# Altium PCB pcbalim.PcbDoc
Units mm, origin at the board's own origin, x right, y up, seen from the top; angles counter-clockwise.
Board outline 83.57 x 50.17 mm, 2 copper layers (Top Layer, Bottom Layer); 22 components, 9 nets, 53 pads, 0 vias.
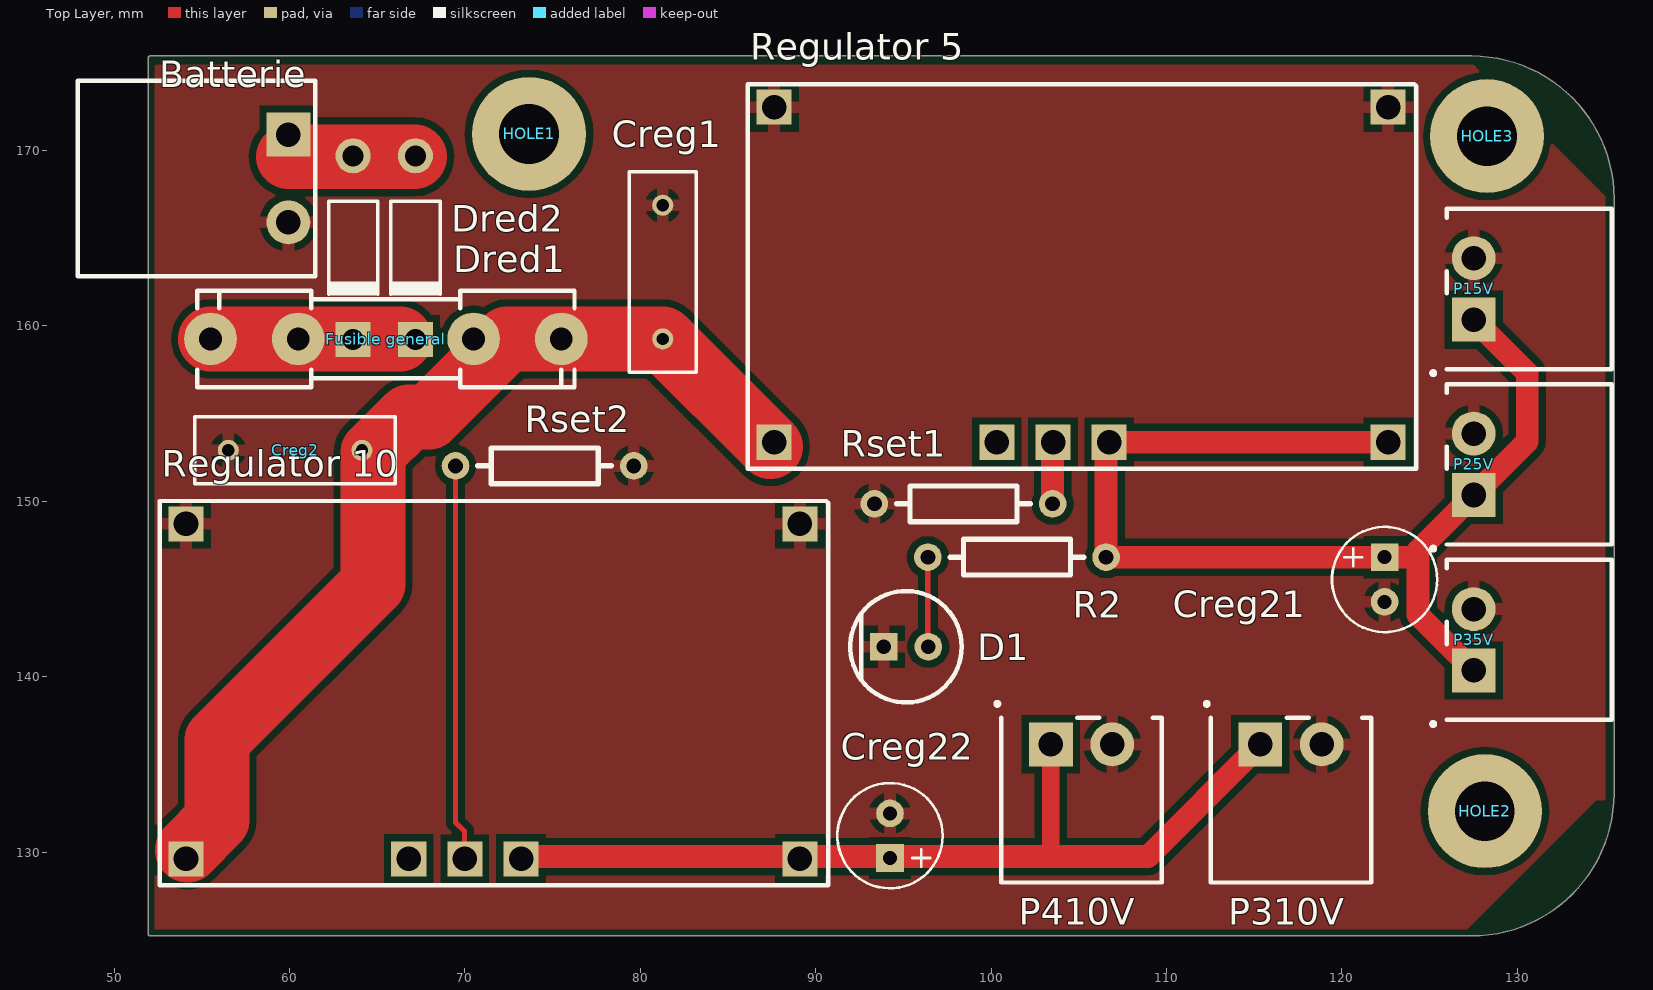
[diagram p0: Top Layer view]
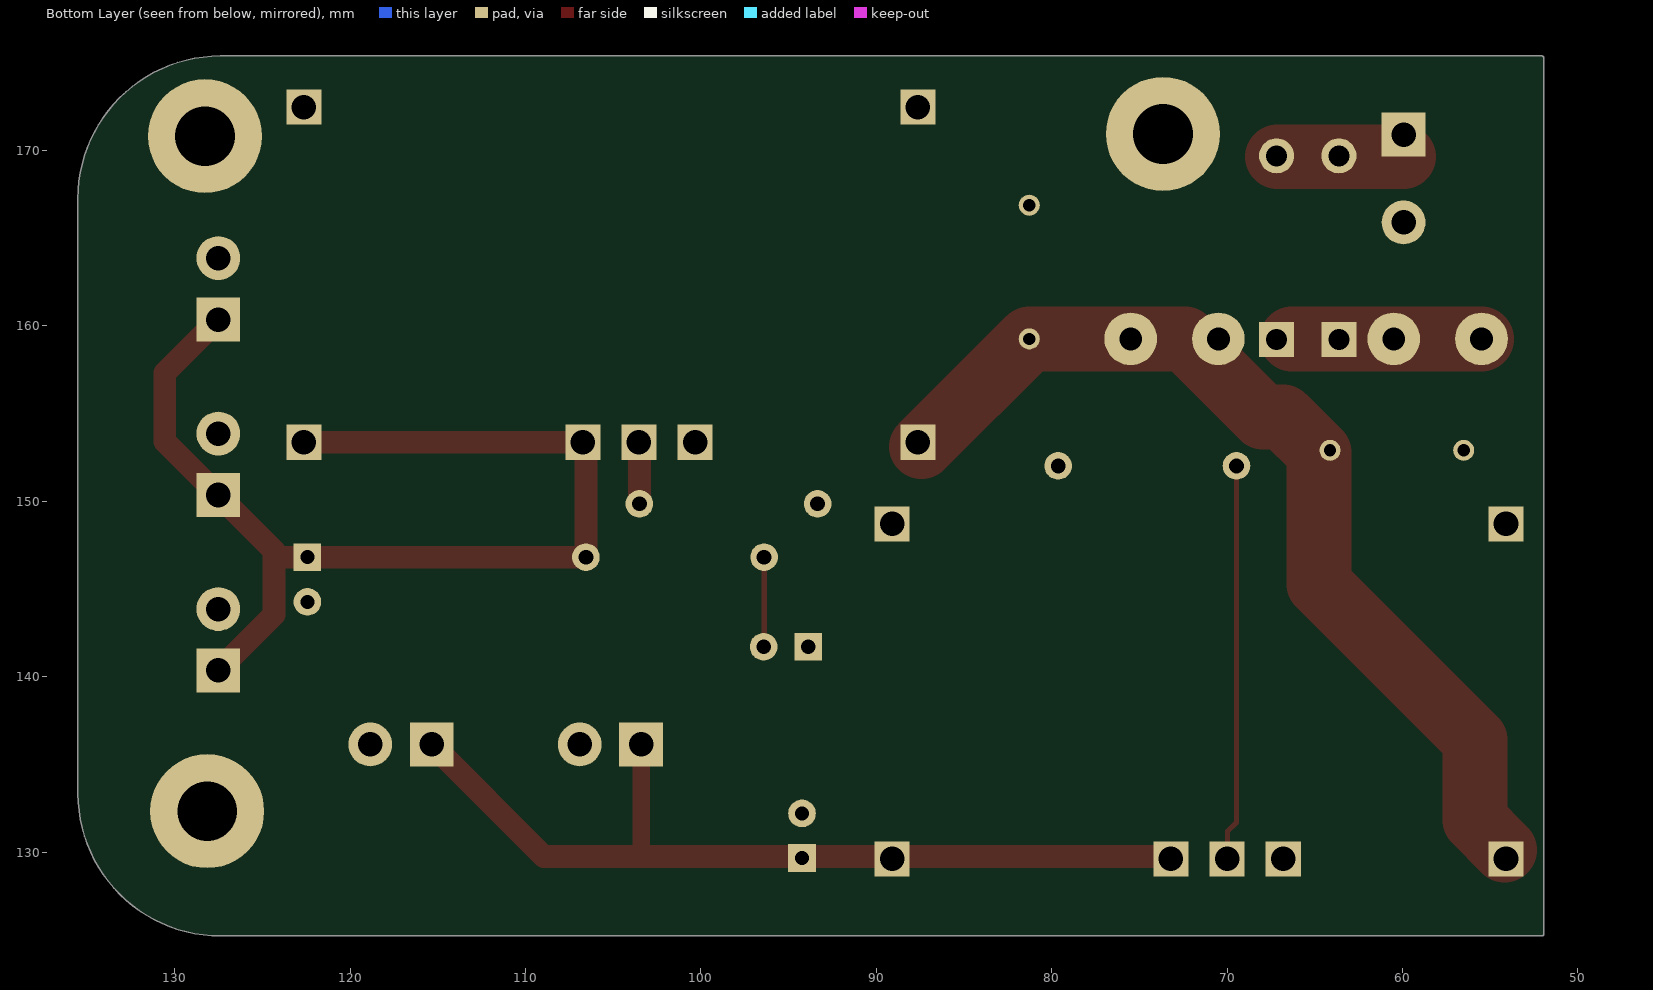
[diagram p1: Bottom Layer view, seen from below]

## Layer stack, top to bottom
Top Layer: signal copper 0.0356
Dielectric: dielectric 0.32, FR-4, Dk 4.8
Bottom Layer: signal copper 0.0356

## Board outline
52.133,125.239 cw(c52.07,125.349) 51.943,125.349 51.943,175.26 cw(c52.07,175.26) 52.07,175.387 127.382,175.387 cw(c127.382,175.26) 127.398,175.386 cw(c127.382,167.259) 135.509,167.259 135.509,133.349 cw(c135.382,133.349) 135.508,133.333 cw(c127.381,133.349) 127.381,125.222 52.197,125.222 cw(c52.197,125.349)

## Design rules (kind name [scope] priority, off if disabled: settings)
Clearance [All] p1: gap=0.4
PlaneConnect [All] p1: planeconnectstyle=Relief reliefexpansion=0.508 reliefentries=4 reliefconductorwidth=0.5 reliefairgap=0.254
PolygonConnect [All] p1: connectstyle=Relief reliefconductorwidth=0.7 reliefentries=4 polygonreliefangle="90 Angle"
RoutingVias [All] p1: holewidth=0.6 width=1 viastyle="Through Hole" minholewidth=0.711 minwidth=1.27 maxholewidth=0.711 maxwidth=1.27
SilkscreenOverComponentPads [All] p1: minsilkscreentomaskgap=0.254
SolderMaskExpansion [All] p1: expansion=0.102
Width [All] p1: maxlimit=30 minlimit=0.3 preferedwidth=0.3 bottomlayer_maxwidth=0.3 minimp=50.000000 maximp=50.000000 favimp=50.000000
26 further rules are at their usual default settings.

## Components (designator, comment, footprint, x,y, rotation, side; value= is the part's Value field where it differs from the comment)
Batterie "bornier" "Bornier male coude 2 voies Gros" 59.944,168.402 r270 top
Creg1 "Cap" RAD-0.3 81.28,163.068 r270 top
Creg2 "Cap" RAD-0.3 60.325,152.908 r0 top
Creg21 "CAP Pol" RB.1/.3 122.428,146.812 r90 top
Creg22 "CAP Pol" RB.1/.3 94.234,129.667 r270 top
D1 "LED bleue !!" "LED 5mm red (dip)" 95.377,141.859 r180 top
Dred1 "Diode 1N4001" DO-41 67.183,164.465 r270 top
Dred2 "Diode 1N4001" DO-41 63.627,164.465 r270 top
"Fusible general" "Fuse" "Fuse Holder 5x20mm" 55.499,159.258 r0 top
HOLE1 "Hole" SCREW 73.66,170.942 r180 top
HOLE2 "Hole" SCREW 128.143,132.334 r90 top
HOLE3 "Hole" SCREW 128.27,170.815 r180 top
P15V "Header 2" "Bornier male coude 2 voies" 127.508,162.11 r90 top
P25V "Header 2" "Bornier male coude 2 voies" 127.508,152.109 r90 top
P35V "Header 2" "Bornier male coude 2 voies" 127.508,142.108 r90 top
P310V "Header 2" "Bornier male coude 2 voies" 117.094,136.144 r0 top
P410V "Header 2" "Bornier male coude 2 voies" 105.156,136.144 r0 top
R2 "RES" AXIAL0.8 106.553,146.812 r180 top
"Regulator 5" "PTN78020W" PTN78020W 87.63,172.466 r0 top
"Regulator 10" "PTN78020W" PTN78020W 54.102,148.717 r0 top
Rset1 "RES" AXIAL0.8 93.345,149.86 r0 top
Rset2 "RES" AXIAL0.8 79.629,152.019 r180 top

## Footprints (in the part's own frame and the unit in brackets; to place one, negate y for a bottom-side part, rotate by r counter-clockwise, add the part's x,y. Pads: shape width x height; smd on the part's side, far side on the other; paste and mask are expansions set on the pad)
AXIAL0.8 [mil] "Resistor 1/4W"
  round 62 hole 33.46: 1(0,0) 2(400,0)
  silkscreen extent 50,-40 350,40, body extent -12,-45 412,46, height 116
"Bornier male coude 2 voies" [mm] "Bornier male coude 2 voies 12A. Pas 5mm (model : CTB9350/2A) -- 3D FAUSSE"
  rect 2.5x2.5 hole 1.4: 1(-1.75,0)
  round 2.5 hole 1.4: 2(1.75,0)
  silkscreen extent -4.9,-7.87 4.57,2.41, body extent -4.2,-7.93 4.2,1.27, height 7.25
"Bornier male coude 2 voies Gros" [mm] "Bornier male coude 2 voies 12A. Pas 5mm (model : CTB9350/2A) -- 3D FAUSSE"
  rect 2.5x2.5 hole 1.4: 1(-2.5,0)
  round 2.5 hole 1.4: 2(2.5,0)
  silkscreen extent -5.57,-12 5.57,1.52, body extent -5.57,-12 5.57,1.52, height 8
DO-41 [mm] "Diode, Axial; Body 5.2 x 2.7 mm (LxDia. max), Lead Dia. 0.86 mm (max)"
  round 2 hole 1.2: 1(-5.23,0)
  rect 2x2 hole 1.2: 2(5.23,0)
  silkscreen extent -2.65,-1.4 2.74,1.4
"Fuse Holder 5x20mm" [mm] "Schurter Fuse Holder 0751.0110"
  round 3 hole 1.3: 1(0,0) 1(5,0) 2(15,0) 2(20,0)
  silkscreen extent -0.75,-2.75 20.75,2.75, body extent -0.51,-3.1 20.58,3.1, height 9.86
"LED 5mm red (dip)" [mil] "LED 5mm red (dip) straight"
  round 62 hole 32: A(-40.94,5.91)
  rect 62x62 hole 32: K(59.06,5.91)
  silkscreen extent -116,-119 134,131, body extent -104,-106 124,122, height 925
PTN78020W [mm]
  rect 2x2 hole 1.4: 1(0,0) 2(0,-19.1) 3(12.7,-19.1) 4(15.9,-19.1) 5(19.1,-19.1) 6(35,-19.1) 7(35,0)
  silkscreen extent -1.5,-20.6 36.6,1.3
RAD-0.3 [mm] "Radial Cap, Thru-Hole; 2 Leads; 0.3 in Pin Spacing"
  round 1.2 hole 0.7: 1(-3.81,0) 2(3.81,0)
  silkscreen extent -5.71,-1.91 5.71,1.91
RB.1/.3 [mil]
  rect 62x62 hole 31.5: 1(0,0)
  round 62 hole 31.5: 2(-100,0)
  silkscreen extent -168,-118 68,118
SCREW [mm] "Mounting Hole M3"
  round 6.5 hole 3.4: 1(0,0)
  body extent -2.89,-2.52 2.89,2.52, height 10

## Part data
Batterie: library part "Header 2", "Header, 2-Pin"
Creg1 Creg2: "Capacitor"
Creg21 Creg22: "Polarized Capacitor"
D1: library part LED, "Typical LED"
Dred1 Dred2: "1 Amp General Purpose Rectifier"
"Fusible general": library part FUSE
HOLE1 HOLE2 HOLE3: "Mounting Hole for screws"
P15V P25V P35V P310V P410V: "Header, 2-Pin"
R2 Rset1 Rset2: "Resistor"

## Nets (pads, with @x,y where several pads share a name; then routed paths per layer and width w, separated by ;. In a path a pad name is that pad's centre, name@x,y a point inside that pad or via, vN(x,y) a via of type N, cw(c..) or ccw(c..) an arc to the next point about the centre after c; other vN are vias at no path point)
5V: "Regulator 5.5" "Regulator 5.6" Creg21.1 P15V.1 P25V.1 P35V.1 R2.1 | length 64.9
  Top Layer w0.3: R2.1@106.603,146.862 R2.1@106.653,146.812 ; Creg21.1 Creg21.1@122.503,146.887
  Top Layer w1.3: R2.1 106.553,153.189 ; R2.1@106.653,146.812 Creg21.1 123.961,146.812 ; 106.73,153.366 122.63,153.366 ; P35V.1 124.333,143.533 124.333,147.184 P25V.1 130.556,153.407 130.556,157.312 P15V.1
10V: "Regulator 10.5" "Regulator 10.6" Creg22.1 P310V.1 P410V.1 | length 51.1
  Top Layer w1: 103.406,129.843 P410V.1
  Top Layer w1.3: 73.202,129.744 88.594,129.744 108.944,129.744 P310V.1
BAT: "Fusible general.2" "Regulator 5.2" "Regulator 10.2" Creg1.2 Creg2.2 | length 55.7
  Top Layer w0.3: 53.594,129.744 53.975,130.125 54.179,130.125
  Top Layer w3.7: 54.179,130.125 55.88,131.826 55.88,136.398 64.77,145.288 64.77,152.781 66.802,154.813 67.967,154.813 72.412,159.258 75.499,159.258 Creg1.2 87.426,153.112
GND: "Regulator 5.1" "Regulator 5.7" "Regulator 10.1" "Regulator 10.7" Batterie.2 Creg1.1 Creg2.1 Creg21.2 Creg22.2 D1.K P15V.2 P25V.2 P35V.2 P310V.2 P410V.2 Rset1.1 Rset2.1
NetBatterie_1: Batterie.1 Dred1.1 Dred2.1 | length 7.2
  Top Layer w3.7: 59.944,169.644 Dred1.1@67.132,169.644
NetD1_A: D1.A R2.2 | length 5.1
  Top Layer w0.3: D1.A@96.393,141.733 R2.2
NetDred1_2: "Fusible general.1" Dred1.2 Dred2.2 | length 10.8
  Top Layer w3.7: 55.499,159.258 60.499,159.258 Dred1.2@66.294,159.258
"NetRegulator 5_4": "Regulator 5.4" Rset1.2 | length 3.5
  Top Layer w1.3: Rset1.2 103.505,153.341
"NetRegulator 10_4": "Regulator 10.4" Rset2.2 | length 22.6
  Top Layer w0.3: Rset2.2 69.469,131.699 69.977,131.191 69.977,129.642 70.002,129.617
pads on no net: "Regulator 5.3" "Regulator 10.3" HOLE1.1 HOLE2.1 HOLE3.1

## Polygon pours and split planes (outlines as drawn)
GND on Top Layer "GND" (solid, pour order 11): 52.324,125.603 52.324,175.006 52.451,174.879 127.508,174.879 135.001,167.386 135.001,132.969 134.493,132.969 127.127,125.603

## Silkscreen, mask and mechanical layers (free items; w line width, h text height)
Mechanical 1:
  lines w0.254: 52.07,125.349 52.07,175.26 127.382,175.26 ; 52.197,125.349 127.381,125.349 ccw(c127.381,133.349) 135.381,133.349 ; 127.382,175.259 cw(c127.382,167.259) 135.382,167.259 135.382,133.349

## Dimensions
135.382,175.26 to 135.382,125.349 on Mechanical 1
135.382,125.349 to 52.07,175.26 on Mechanical 1